# Altium PCB PCB2.PcbDoc
Units mil, origin at the board's own origin, x right, y up, seen from the top; angles counter-clockwise.
Board outline 6000 x 4000 mil, 2 copper layers (Top Layer, Bottom Layer); 27 components, 35 nets, 112 pads, 0 vias.
Unrouted connection lines stored in the file: 59.
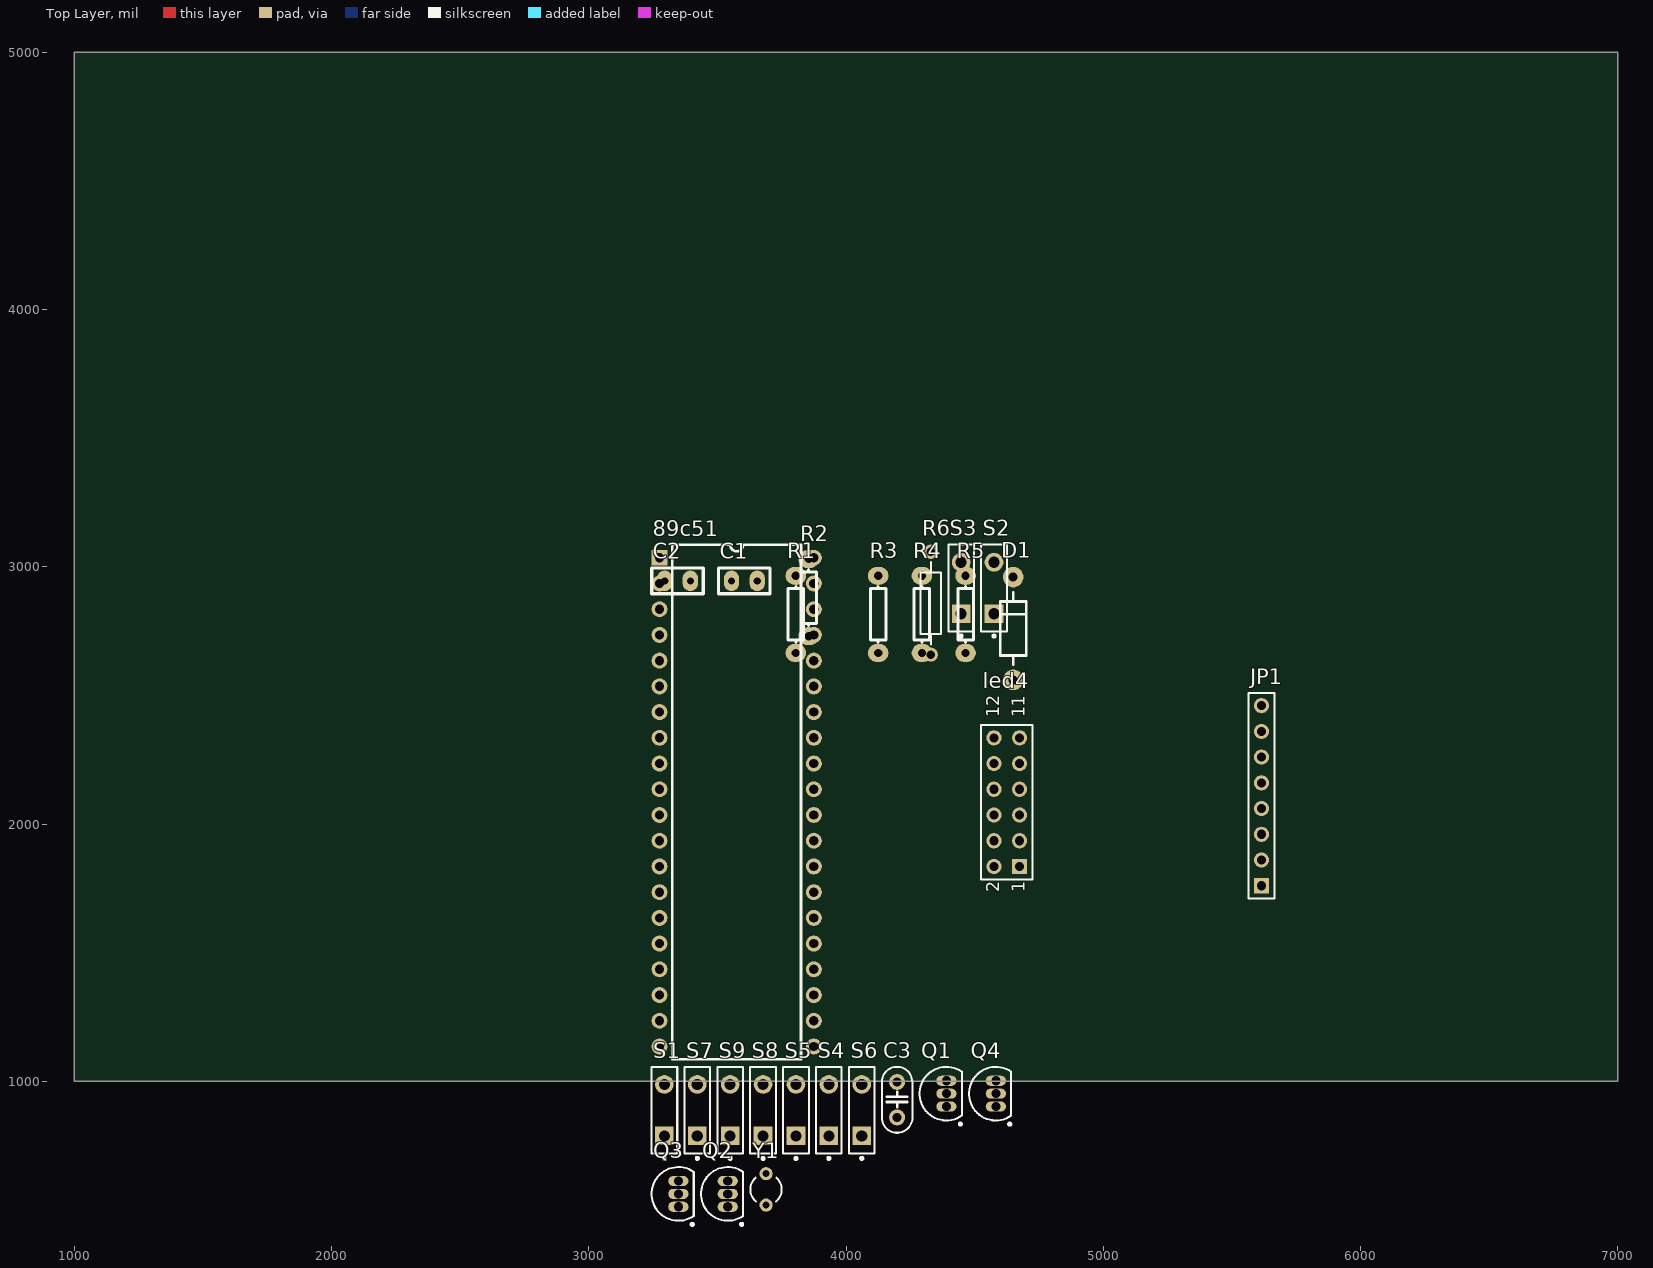
[diagram p0: Top Layer view]
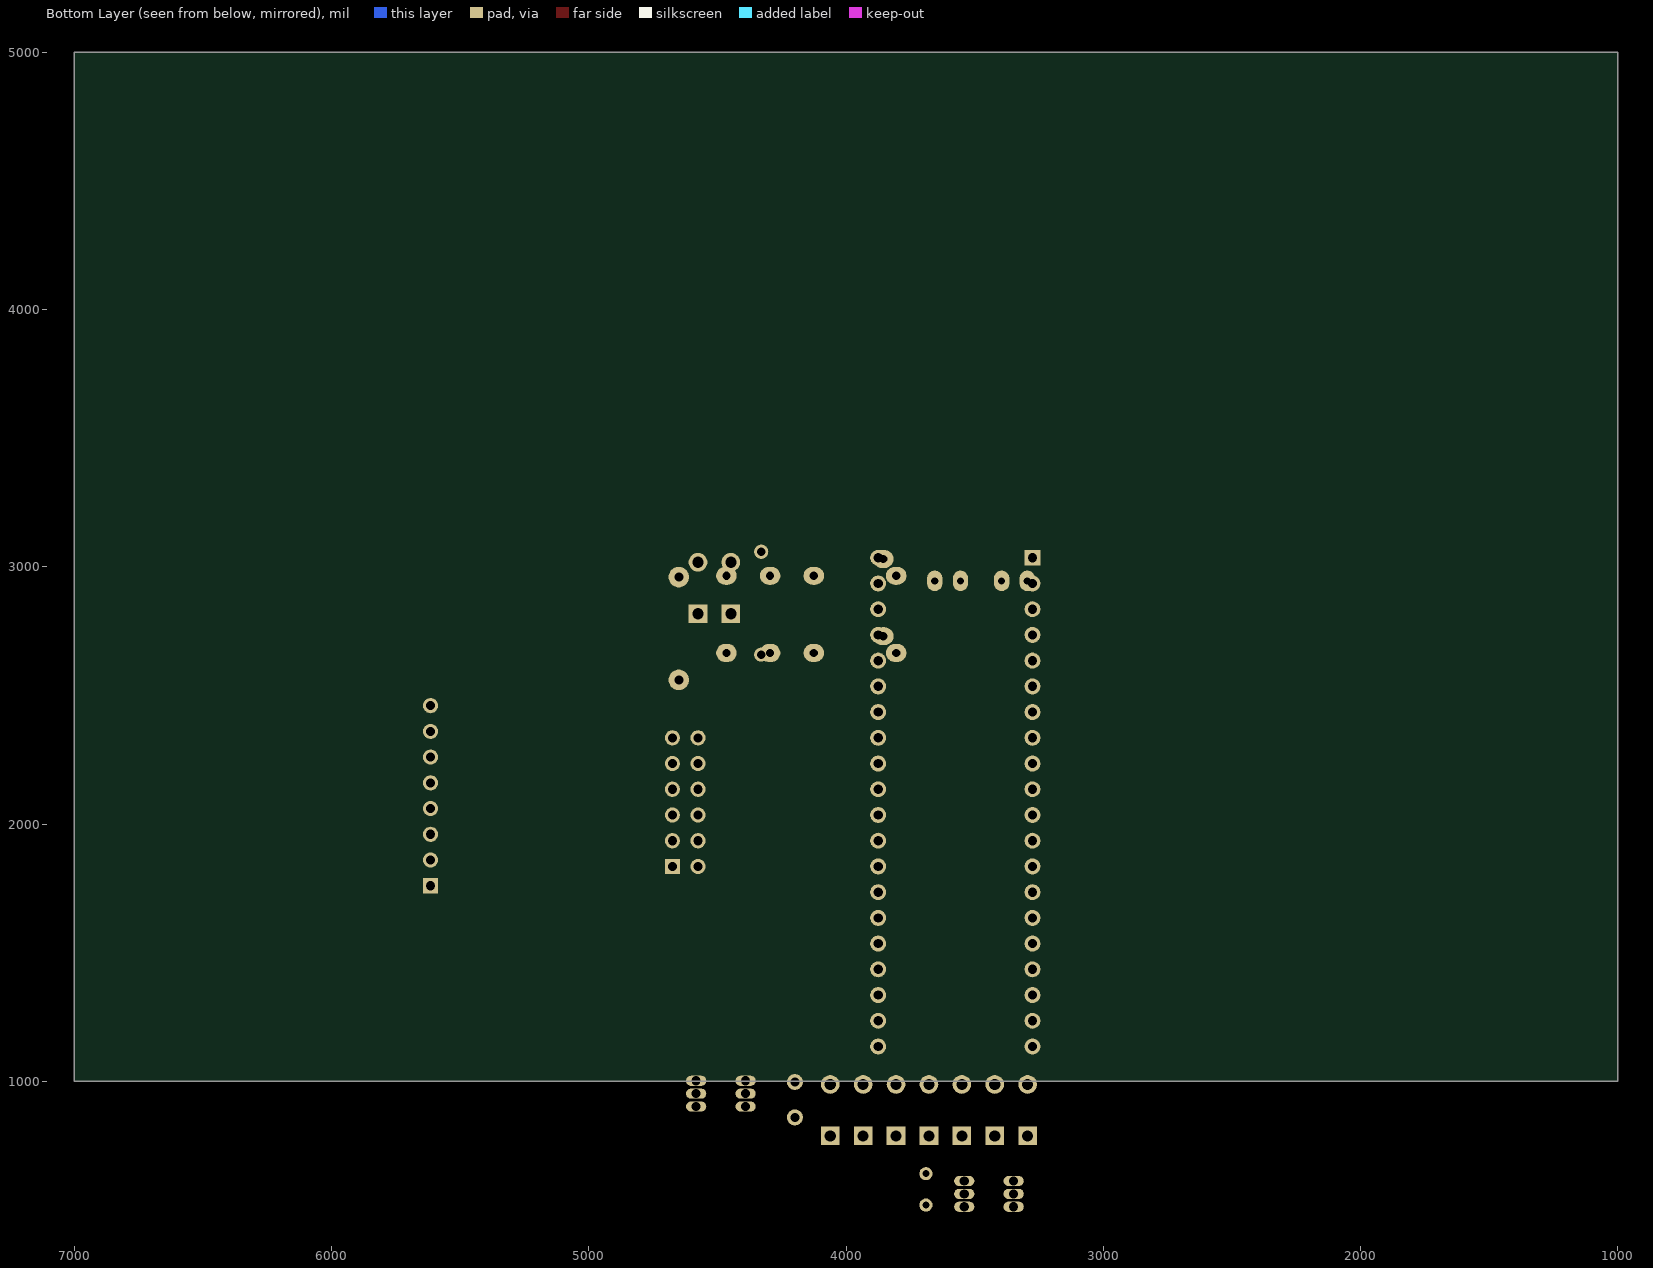
[diagram p1: Bottom Layer view, seen from below]

## Layer stack, top to bottom
Top Layer: signal copper 1.4
Dielectric: dielectric 12.6, FR-4, Dk 4.8
Bottom Layer: signal copper 1.4

## Board outline
1000,1000 7000,1000 7000,5000 1000,5000

## Design rules (kind name [scope] priority, off if disabled: settings)
Clearance [All] p1: gap=10
PolygonConnect [All] p1: connectstyle=Relief reliefconductorwidth=10 reliefentries=4 polygonreliefangle="90 Angle" airgapwidth=10
RoomDefinition Sheet1 [InComponentClass('Sheet1')] p1: confinementstyle=ConfineIn formatcopy=TRUE lockcomponents=FALSE outline 3230,2510 4710,2510 4710,3110 3230,3110
RoutingVias [All] p1: holewidth=28 width=50 viastyle="Through Hole" minholewidth=28 minwidth=50 maxholewidth=28 maxwidth=50
SolderMaskExpansion [All] p1: expansion=4
Width [All] p1: maxlimit=10 minlimit=10 preferedwidth=10
28 further rules are at their usual default settings.

## Components (designator, comment, footprint, x,y, rotation, side; value= is the part's Value field where it differs from the comment)
89c51 "89C51" DIP40 3275,3035 r0 top
C1 "30p" RAD0.1 3605,2945 r0 top
C2 "30p" RAD0.1 3345,2945 r0 top
C3 "10u" cap 4198.63,859.21 r90 top
D1 "发光二极管" DIODE0.4A 4670,2760 r90 top
JP1 "8 HEADER" HDR1X8 5615,1760 r90 top
led4 "LED4_1" HDR2X6 4675,1835 r90 top
Q1 "NPN" TO-226-AA 4390.42,951.73 r0 top
Q2 "NPN" TO-226-AA 3540.35,562.01 r0 top
Q3 "NPN" TO-226-AA 3348.27,562.01 r0 top
Q4 "NPN" TO-226-AA 4582.5,951.73 r0 top
R1 "4.7k" AXIAL0.3 3805,2815 r90 top
R2 "4.7k" AXIAL0.3 3855,2880 r90 top
R3 "4.7k" AXIAL0.3 4125,2815 r90 top
R4 "4.7k" AXIAL0.3 4295,2815 r90 top
R5 "470" AXIAL0.3 4465,2815 r90 top
R6 "R6" AXIAL-0.4 4329.69,2858.44 r90 top
S1 "SW-PB" SPST-2 3293.94,887.56 r90 top
S2 "SW-PB" SPST-2 4575.43,2917.56 r90 top
S3 "SW-PB" SPST-2 4447.56,2917.56 r90 top
S4 "SW-PB" SPST-2 3933.31,887.56 r90 top
S5 "SW-PB" SPST-2 3805.43,887.56 r90 top
S6 "SW-PB" SPST-2 4061.18,887.56 r90 top
S7 "SW-PB" SPST-2 3421.81,887.56 r90 top
S8 "SW-PB" SPST-2 3677.56,887.56 r90 top
S9 "SW-PB" SPST-2 3549.68,887.56 r90 top
Y1 "XTAL" R38 3689.13,579.66 r0 top

## Footprints (in the part's own frame and the unit in brackets; to place one, negate y for a bottom-side part, rotate by r counter-clockwise, add the part's x,y. Pads: shape width x height; smd on the part's side, far side on the other; paste and mask are expansions set on the pad)
AXIAL0.3 [mil]
  oval 70x80 hole 32: 1(-150,0) 2(150,0)
  silkscreen extent -109,-30 109,30
AXIAL-0.4 [mm] "Axial Device, Thru-Hole; 2 Leads; 0.4 in Pin Spacing"
  round 1.4 hole 0.85: 1(-5.08,0) 2(5.08,0)
  silkscreen extent -4.06,-1.02 4.06,1.02
cap [mil]
  round 62 hole 36: 1(0,0) 2(137.8,0)
  silkscreen extent -59,-60 197,60
DIODE0.4A [mil]
  round 80 hole 35: A(-200,20) K(200,20)
  silkscreen extent -140,-30 140,70
DIP40 [mil]
  rect 62x62 hole 36: 1(0,0)
  round 62 hole 36: 2(0,-100) 3(0,-200) 4(0,-300) 5(0,-400) 6(0,-500) 7(0,-600) 8(0,-700) 9(0,-800) 10(0,-900) 11(0,-1000) 12(0,-1100) 13(0,-1200) 14(0,-1300) 15(0,-1400) 16(0,-1500) 17(0,-1600) 18(0,-1700) 19(0,-1800) 20(0,-1900) 21(600,-1900) 22(600,-1800) 23(600,-1700) 24(600,-1600) 25(600,-1500) 26(600,-1400) 27(600,-1300) 28(600,-1200) 29(600,-1100) 30(600,-1000) 31(600,-900) 32(600,-800) 33(600,-700) 34(600,-600) 35(600,-500) 36(600,-400) 37(600,-300) 38(600,-200) 39(600,-100) 40(600,0)
  silkscreen extent 50,-1950 550,50
HDR1X8 [mm] "Connector; Header; 8 Position"
  rect 1.5x1.5 hole 0.9: 1(0,0)
  round 1.5 hole 0.9: 2(2.54,0) 3(5.08,0) 4(7.62,0) 5(10.16,0) 6(12.7,0) 7(15.24,0) 8(17.78,0)
  silkscreen extent -1.27,-1.27 19.05,1.27
HDR2X6 [mm] "Connector; Header; 6x2 Position"
  rect 1.5x1.5 hole 0.9: 1(0,0)
  round 1.5 hole 0.9: 2(0,2.54) 3(2.54,0) 4(2.54,2.54) 5(5.08,0) 6(5.08,2.54) 7(7.62,0) 8(7.62,2.54) 9(10.16,0) 10(10.16,2.54) 11(12.7,0) 12(12.7,2.54)
  silkscreen extent -1.27,-1.27 13.97,3.81
R38 [mm] "Crystal, Thru-Hole; 2 Leads; Body 3.1 x 8.2 mm (Dia.xH)"
  round 1.3 hole 0.7: 1(0,1.55) 2(0,-1.55)
  silkscreen extent -1.55,-1.19 1.55,1.17
RAD0.1 [mil]
  oval 60x80 hole 28: 1(-50,0) 2(50,0)
  silkscreen extent -100,-50 100,50
SPST-2 [mm] "Switch; 2 Leads"
  rect 1.85x1.85 hole 1.1: 1(-2.54,0)
  round 1.85 hole 1.1: 2(2.54,0)
  silkscreen extent -4.89,-1.27 4.28,1.27
TO-226-AA [mm] "TO, Flat Index; 3 In-Line, Axial Leads; Body Dia. 4.8mm; Leads 0.55 x 0.51 mm (max)"
  oval 2x1 hole 0.9: 1(0,-1.27) 2(0,0) 3(0,1.27)
  silkscreen extent -2.65,-3.13 1.52,2.65, body extent -2.66,-2.66 1.52,2.66, height 5.33

## Part data
C1 C2: library part 普通电容, "Capacitor"
C3: library part 电解电容, "Capacitor"
JP1: "8 Pin Header"
led4: library part LED4_LWQ
Q1 Q2 Q3 Q4: "NPN Bipolar Transistor"
R1 R2 R3 R4 R5: library part RES
R6: library part Res2, "Resistor"
S1 S2 S3 S4 S5 S6 S7 S8 S9: "Switch"
Y1: "Crystal Oscillator"

## Nets (pads, with @x,y where several pads share a name; then routed paths per layer and width w, separated by ;. In a path a pad name is that pad's centre, name@x,y a point inside that pad or via, vN(x,y) a via of type N, cw(c..) or ccw(c..) an arc to the next point about the centre after c; other vN are vias at no path point)
GND: C1.1 C2.1 R5.2 R6.1 S1.1 S2.1 S3.1 S4.1 S5.1 S6.1 S7.1 S8.1
Net89c51_9: 89c51.9 S9.2
Net89c51_18: 89c51.18 C1.2 Y1.2
Net89c51_19: 89c51.19 C2.2 Y1.1
NetC3_2: C3.2 R6.2 S9.1
NetD1_K: D1.K R5.1
Netled4_9: led4.9 Q1.3
Netled4_10: led4.10 Q2.3
Netled4_11: led4.11 Q3.3
Netled4_12: led4.12 Q4.3
NetQ1_1: Q1.1 R1.1
NetQ2_1: Q2.1 R2.1
NetQ3_1: Q3.1 R3.1
NetQ4_1: Q4.1 R4.1
P0_0: 89c51.39 JP1.1 led4.1
P0_1: 89c51.38 JP1.2 led4.2
P0_2: 89c51.37 JP1.3 led4.3
P0_3: 89c51.36 JP1.4 led4.4
P0_4: 89c51.35 JP1.5 led4.5
P0_5: 89c51.34 JP1.6 led4.6
P0_6: 89c51.33 JP1.7 led4.7
P0_7: 89c51.32 JP1.8 led4.8
P1_0: 89c51.1 S1.2
P1_1: 89c51.2 S2.2
P1_2: 89c51.3 S3.2
P1_3: 89c51.4 S4.2
P1_4: 89c51.5 S5.2
P1_5: 89c51.6 S6.2
P1_6: 89c51.7 S7.2
P1_7: 89c51.8 S8.2
P2_0: 89c51.21 Q1.2
P2_1: 89c51.22 Q2.2
P2_2: 89c51.23 Q3.2
P2_3: 89c51.24 Q4.2
VCC: C3.1 R1.2 R2.2 R3.2 R4.2
pads on no net: 89c51.10 89c51.11 89c51.12 89c51.13 89c51.14 89c51.15 89c51.16 89c51.17 89c51.20 89c51.25 89c51.26 89c51.27 89c51.28 89c51.29 89c51.30 89c51.31 89c51.40 D1.A

## Text inside footprints (layer, text, board x,y; h text height)
led4: Top Overlay "2" at 4595,1735 h50 r90; Top Overlay "1" at 4695,1735 h50 r90; Top Overlay "1" at 4695,2415 h50 r90; Top Overlay "1" at 4695,2455 h50 r90; Top Overlay "12" at 4595,2415 h50 r90